# EAGLE board NeoJointV2A-097p57 (EAGLE 6.6.0)
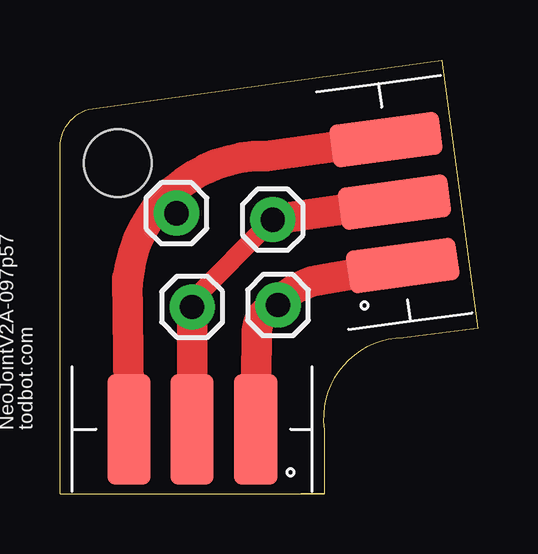
[diagram p0: board, top side]

Size 17.41 x 18.1 mm. Coordinates in mm from the lower left corner, seen from the top.
Outline: 10.04,0 0.01,0 0.01,13.9 0.01,14.3 arc-90 1.51,16.1 15.91,18.1 17.41,6.9 14.31,6.5 arc98 11.01,2.7 11.01,0
Outline: 10.04,0 11.01,0
Outline: 11.01,0 10.04,0
Copper layers (1*16): Top 0.0356mm / dielectric 1.5011mm / Bottom 0.0356mm
Design rules "LaenPCBOrder-tod": minimum track width 10mil, minimum drill 13mil, track to track 6mil, track to pad 8mil, pad to pad 8mil, via to via 8mil, smd to smd 6mil, copper to edge 15mil, drill to drill 8mil, minimum pad ring 7mil, minimum via ring 7mil, stop-mask expansion 4mil, vias tented up to drill 25mil, thermal gap 10mil
Holes 2.8 mm at 2.41,13.8

## Footprints (pad centres in the part's own frame; a part is rotated, then mirrored left to right if it is on the bottom)
1X01 = drill 1.016 pad 1.88: 1 0,0
LEDSTRIP-3P = smd 4.6 x 1.8: A 0,-2.65; B 0,0; C 0,2.63

## Placement (x,y rotation side)
JP1  [1X01]  9.08,7.88 0 top
JP2  [1X01]  8.86,11.44 0 top
JP3  [1X01]  4.85,11.71 0 top
JP4  [1X01]  5.51,7.8 0 top
U$1  LED_STRIP_3P  [LEDSTRIP-3P]  5.51,2.7 90 top
U$2  LED_STRIP_3P  [LEDSTRIP-3P]  13.93,12.16 7.6 top

## Library data of the parts
JP1-JP4 = SparkFun-Connectors
U$1 U$2 = todstuff

## Nets
A: JP1.1 U$1.A U$2.A
B: JP2.1 JP4.1 U$1.B U$2.B
C: JP3.1 U$1.C U$2.C

## Tracks (layer width: path | path; a pad name or v marks a point on that pad's centre or on a via)
A
  Top 1.27: U$2.A 10.71,8.9 arc44 JP1.1 arc77 8.21,6.8 U$1.A
B
  Top 0.61: 5.51,8.08 JP4.1
  Top 0.813: JP2.1 5.51,8.08
  Top 1.27: U$2.B JP2.1 | U$1.B JP4.1
C
  Top 0.61: JP3.1 4.01,11.46 2.81,9
  Top 1.27: U$2.C 8.61,14.1 arc90 2.81,8.5 2.81,9 U$1.C

## Text on the board
tPlace: NeoJointV2A-097p57 | todbot.com